# Altium PCB board.PcbDoc
Units mm, origin at the board's own origin, x right, y up, seen from the top; angles counter-clockwise.
Board outline 5 x 6 mm, 2 copper layers (Top Layer, Bottom Layer), stack 0.97 mm thick; 7 components, 5 nets, 22 pads, 11 vias.
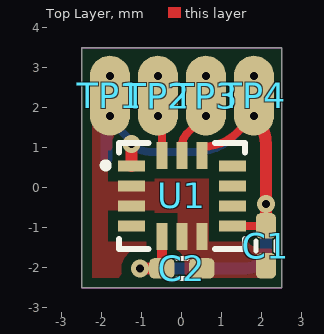
[diagram p0: Top Layer view]
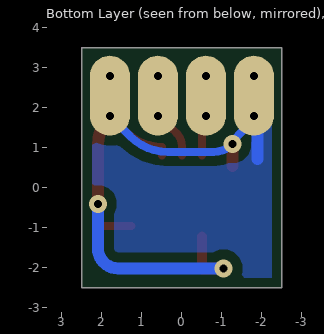
[diagram p1: Bottom Layer view, seen from below]

## Layer stack, top to bottom
Top Solder: solder mask 0.0127, Solder Resist, Dk 3.8
Top Layer: signal copper 0.035
Dielectric: core 0.9, FR-4, Dk 4.5
Bottom Layer: signal copper 0.035
Bottom Solder: solder mask 0.0127, Solder Resist, Dk 3.8

## Board outline
-2.5,-2.5 -2.5,3.5 2.5,3.5 2.5,-2.5

## Design rules (kind name [scope] priority, off if disabled: settings)
AcuteAngle [All] p1: minimum=6.00000000000000E+0001 checktracksonly=FALSE
Clearance Clearance_1 [InNetClass('220') vs InNetClass('220')] p1: gap=1.2 ignorepadtopadclearanceinfootprint=FALSE
Clearance [All] p2: gap=0.25 ignorepadtopadclearanceinfootprint=FALSE except(0.13: Arc-Arc Arc-Track Arc-SMDPad Arc-Via Track-Track Track-SMDPad Track-Via SMDPad-SMDPad SMDPad-Via THPad-Via Via-Via; 0.15: Arc-THPad Arc-Text Arc-Hole Track-THPad Track-Text Track-Hole SMDPad-THPad SMDPad-Text SMDPad-Hole THPad-THPad THPad-Text THPad-Hole Via-Text Via-Hole Fill-Text Fill-Hole Poly-Text Poly-Hole Region-Text Region-Hole Text-Text Text-Hole)
ComponentClearance [All] p1: gap=-111 collisioncheckmode=3 verticalgap=2540 showdistances=FALSE
HoleSize [All] p1: absolutevalues=TRUE maxlimit=6 minlimit=0.2 maxpercent=80.000 minpercent=20.000
HoleToHoleClearance HoleToHoleClearance_1 [IsVia vs IsThruPin] p1: gap=0.7 allowstackedmicrovias=TRUE
HoleToHoleClearance [All] p2: gap=0.5 allowstackedmicrovias=TRUE
MinimumSolderMaskSliver [All] p1 off: minsoldermaskwidth=0.254
PlaneClearance [All] p1: clearance=0.45
PlaneConnect [All] p1: planeconnectstyle=Direct reliefexpansion=0.3 reliefentries=4 reliefconductorwidth=0.381 reliefairgap=0.178
PolygonConnect [All] p1: connectstyle=Direct reliefconductorwidth=0.381 reliefentries=4 polygonreliefangle="90 Angle" airgapwidth=0.356
RoutingVias [All] p1: holewidth=0.3 width=0.6 viastyle="Through Hole" minholewidth=0.2 minwidth=0.45 maxholewidth=0.9 maxwidth=1.27
SilkToSilkClearance [All] p1 off: silktosilkclearance=0.254
SilkToSolderMaskClearance [IsPad] p1 off: minsilkscreentomaskgap=0.254 clearancetoexposedcopper=TRUE
SolderMaskExpansion [All] p1: expansion=0.102 istentingtop=FALSE
UnRoutedNet [All] p1: checkbadconnections=TRUE
Width [All] p1: maxlimit=3.81 minlimit=0.14 preferedwidth=0.254
21 further rules are at their usual default settings.

## Components (designator, comment, footprint, x,y, rotation, side; value= is the part's Value field where it differs from the comment)
C1 "100nF" C0402 2.1,-1.45 r90 top
C2 "100nF" C0402 0,-2.012 r180 top
TP1 "" TP2030_SMD#1 -1.8,2.3 r180 top
TP2 "" TP2030_SMD#1 -0.6,2.3 r180 top
TP3 "" TP2030_SMD#1 0.6,2.3 r180 top
TP4 "" TP2030_SMD#2 1.9,2.3 r0 top
U1 "LSM6DSOTR" LGA-14_L3.0-W2.5-P0.50-TL 0,-0.2 r0 top

## Footprints (in the part's own frame and the unit in brackets; to place one, negate y for a bottom-side part, rotate by r counter-clockwise, add the part's x,y. Pads: shape width x height; smd on the part's side, far side on the other; paste and mask are expansions set on the pad)
C0402 [mm] "Chip Capacitor Body"
  rrect50% 0.635x0.508 smd mask+0.05: 1(-0.5,0) 2(0.5,0)
  silkscreen extent -0.13,-0.25 0.13,0.25, body extent -0.52,-0.27 0.53,0.28, height 0.55
LGA-14_L3.0-W2.5-P0.50-TL [mm]
  rect 0.675x0.28 smd paste+0 mask+0.051: 1(-1.262,0.75) 2(-1.262,0.25) 3(-1.262,-0.25) 4(-1.262,-0.75) 8(1.262,-0.75) 9(1.262,-0.25) 10(1.262,0.25) 11(1.262,0.75)
  rect 0.28x0.675 smd paste+0 mask+0.051: 5(-0.5,-1.012) 6(0,-1.012) 7(0.5,-1.012) 12(0.5,1.012) 13(0,1.012) 14(-0.5,1.012)
  silkscreen extent -1.98,-1.33 1.58,1.33
TP2030_SMD#1 [mm] "TP30_SMD"
  oval 1x2 all layers, no hole mask+0.05: 1(0,-0.005)
TP2030_SMD#2 [mm] "TP30_SMD"
  oval 1x2 all layers, no hole mask+0.05: 1(-0.1,0.005)

## Part data
C1 C2: library part CAP, LCSC part number=C131394, P/N=CC0402KRX7R9BB104
TP1 TP2 TP3 TP4: library part TP_Dup1
U1: LCSC part number=C2655100, P/N=LSM6DSOTR

## Via types
v1: diameter 0.45, hole 0.2, Top Layer to Bottom Layer, tented both sides, 11 vias

## Nets (pads, with @x,y where several pads share a name; then routed paths per layer and width w, separated by ;. In a path a pad name is that pad's centre, name@x,y a point inside that pad or via, vN(x,y) a via of type N, cw(c..) or ccw(c..) an arc to the next point about the centre after c; other vN are vias at no path point)
C: TP3.1 U1.13 | length 1.7
  Top Layer w0.2: U1.13 0,1.048 cw(c0.447,1.048) 0.131,1.364 0.27,1.504 ccw(c-0.526,2.3) TP3.1@0.6,2.3
  other v1: 0.6,1.8 0.6,2.8
D: TP2.1 U1.14 | length 1
  Top Layer w0.2: v1(-0.6,1.8) cw(c-0.841,1.559) -0.5,1.559 U1.14
  other v1: -0.6,2.8
GND: C1.1 C2.1 TP1.1 U1.2 U1.3 U1.6 U1.7 | length 1.1
  Bottom Layer w0.3: -1.891,0.718 TP1.1@-1.891,1.824
  other v1: -1.8,1.8 -1.8,2.8
SEL: U1.1 | length 4.4
  Top Layer w0.3: U1.1 v1(-1.262,1.094)
  Bottom Layer w0.2: -1.531,1.437 -1.262,1.168 v1(-1.262,1.094) ccw(c-0.795,1.561) -0.795,0.9 0.353,0.9 ccw(c0.353,2.221) 1.287,1.287 1.8,1.8
V: C1.2 C2.2 TP4.1 U1.5 U1.8 U1.12 | length 11.3
  Top Layer w0.2: U1.12 0.5,1.025 ccw(c0.5,2.294) 1.397,1.397 v1(1.8,1.8) ; U1.8 C1.2
  Top Layer w0.25: C2.2 U1.5
  Top Layer w0.3: v1(-1.043,-2.012) C2.2 ; v1(1.8,1.8) cw(c1.076,1.076) 2.1,1.076 v1(2.1,-0.406) C1.2
  Bottom Layer w0.3: v1(-1.043,-2.012) 1.6,-2.012 ccw(c1.6,-1.512) 2.1,-1.512 v1(2.1,-0.406)
  other v1: 1.8,2.8
pads on no net: U1.4 U1.9 U1.10 U1.11

## Polygon pours and split planes (outlines as drawn)
GND on Top Layer "NONET_L02_P-001" (solid, remove dead copper, pour order 0): -2.5,2.3 -2.5,-2.5 2.5,-2.5 2.5,2.3
GND on Bottom Layer "NONET_L02_P-001" (solid, remove dead copper, pour order 1): -2.5,2.305 -2.5,-2.5 2.5,-2.5 2.5,2.305

## Keep-outs
Keep-Out Layer:
  the board outline again, w0.01